# EAGLE board PicoTuner Adaptor (EAGLE 7.7.0)
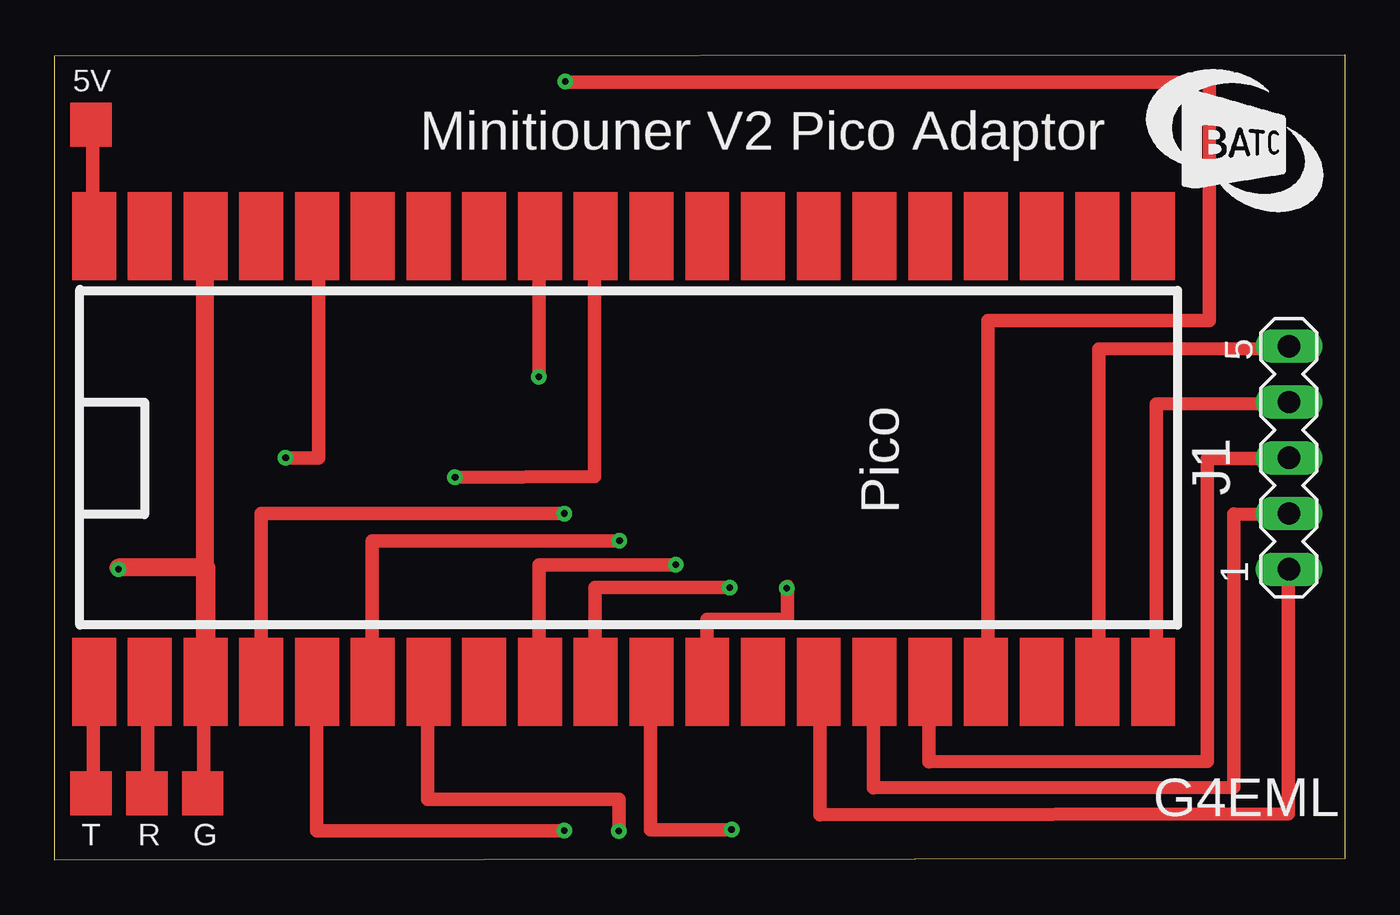
[diagram p0: board, top side]
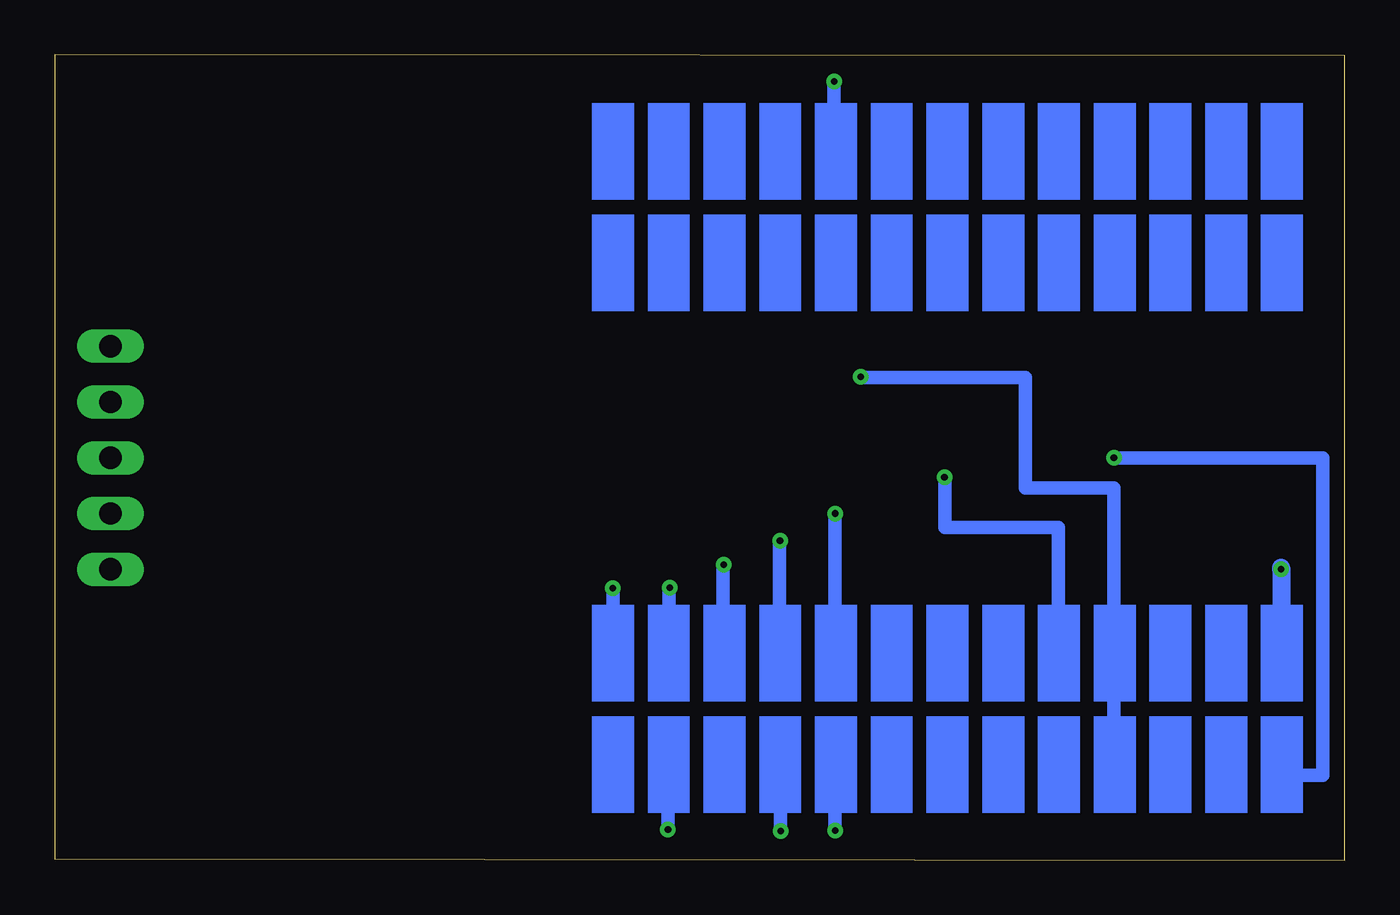
[diagram p1: board, bottom side, seen from below]

Size 58.78 x 36.7 mm. Coordinates in mm from the lower left corner, seen from the top.
Outline: 0,0 0,36.65 58.78,36.7 58.78,0.05 0,0
Copper layers (1*16): Top 0.035mm / dielectric 1.5mm / Bottom 0.035mm
Design rules "default": minimum track width 10mil, minimum drill 24mil, track to track 8mil, track to pad 8mil, pad to pad 8mil, via to via 8mil, smd to smd 8mil, copper to edge 40mil, drill to drill 8mil, minimum pad ring 10mil, minimum via ring 8mil, stop-mask expansion 4mil, vias tented up to drill 0mil, thermal gap 10mil

## Footprints (pad centres in the part's own frame; a part is rotated, then mirrored left to right if it is on the bottom)
MA05-1 = drill 1.016 long: 1 -5.08,0; 2 -2.54,0; 3 0,0; 4 2.54,0; 5 5.08,0

## Placement (x,y rotation side)
E$1  [MA05-1]  56.24,18.34 90 top

## Library data of the parts
E$1 = con-lstb

## Tracks (layer width: path | path; a pad name or v marks a point on that pad's centre or on a via)
S$1  (via drill 0.3)
  Top 0.61: 9.4,8.76 9.4,15.8 v23.22,15.8
  Bottom 0.61: v23.22,15.8 23.22,10.72
S$2  (via drill 0.3)
  Top 0.61: 11.94,6.93 11.94,1.35 v23.22,1.35
  Bottom 0.61: v23.22,1.35 23.22,3.1
S$3  (via drill 0.3)
  Top 0.305: v25.73,14.55 25.76,14.55
  Top 0.61: 14.45,9.02 14.45,14.55 v25.73,14.55
  Bottom 0.61: 25.76,14.55 25.76,10.72
S$4  (via drill 0.3)
  Top 0.305: v25.7,1.32 25.7,1.27
  Top 0.61: 16.99,7.19 16.99,2.77 25.7,2.77 v25.7,1.32
  Bottom 0.305: 25.7,1.27 v25.7,1.32 | 25.7,3.02 25.78,3.02
  Bottom 0.61: v25.7,1.32 25.7,3.02
S$5
  Top 0.61: 34.87,6.71 34.87,2.06 56.21,2.11 56.21,13.26
S$6  (via drill 0.3)
  Top 0.305: v28.3,13.46 28.32,13.46
  Top 0.61: 22.07,9.25 22.07,13.46 v28.3,13.46
  Bottom 0.305: 28.32,10.72 28.3,10.72
  Bottom 0.61: 28.32,13.46 28.32,10.72
S$7  (via drill 0.3)
  Top 0.305: v30.76,12.42 30.78,12.42
  Top 0.61: 24.61,9.37 24.61,12.42 v30.76,12.42
  Bottom 0.305: 30.78,10.72 30.84,10.72
  Bottom 0.61: 30.78,12.42 30.78,10.72
S$8  (via drill 0.3)
  Top 0.61: 27.15,6.76 27.15,1.37 30.84,1.37
  Bottom 0.305: 30.84,1.37 v30.84,1.4 | 30.84,3.12 30.81,3.12
  Bottom 0.61: v30.84,1.4 30.84,3.12
S$9  (via drill 0.3)
  Top 0.305: 33.38,12.47 33.35,12.47
  Top 0.61: 29.72,9.25 29.72,10.97 33.38,10.97 33.38,12.47
  Bottom 0.305: 33.35,12.47 v33.35,12.4 | 33.35,10.69 33.43,10.69
  Bottom 0.61: v33.35,12.4 33.35,10.69
S$10
  Top 0.61: 37.31,6.78 37.31,3.3 53.72,3.33 53.72,15.77 56.16,15.75
S$11
  Top 0.61: 39.83,6.76 39.83,4.47 52.53,4.5 52.53,18.31 56.18,18.31
S$12
  Top 0.61: 42.52,8.74 42.52,24.59 52.6,24.59 52.6,35.46 23.27,35.46
  Bottom 0.305: 23.27,33.58 23.22,33.58
  Bottom 0.61: 23.27,35.46 23.27,33.58
S$13  (via drill 0.3)
  other vias: 23.27,35.48
S$14
  Top 0.61: 50.19,8.74 50.19,20.78 56.24,20.8
S$15
  Top 0.61: 47.57,8.43 47.57,23.29 56.29,23.32
S$16  (via drill 0.3)
  Top 0.61: 12.01,27.58 12.01,18.34 v10.52,18.34
  Bottom 0.61: v10.52,18.34 0.99,18.34 0.99,3.86 2.92,3.86
S$17
  Top 0.305: 22.07,27.53 21.84,27.53
  Top 0.61: 22.07,22.05 22.07,27.53
  Bottom 0.61: 10.52,5.64 10.52,16.97 14.53,16.97
S$18  (via drill 0.3)
  other vias: 22.05,22.02
S$19  (via drill 0.3)
  Top 0.61: 24.59,27.03 24.59,17.48 v18.24,17.45
S$20
  Bottom 0.61: 14.55,16.97 14.55,22 22.05,22
S$21
  Bottom 0.305: 18.21,17.4 18.31,17.4
  Bottom 0.61: 13.06,10.72 13.06,15.16 18.21,15.16 18.21,17.4
S$22  (via drill 0.3)
  Top 0.813: 6.83,27.58 6.83,8.46 6.91,8.46 6.91,13.34 2.9,13.34
  Bottom 0.813: 2.9,13.34 v2.9,13.26 2.9,10.54 3.18,10.54
S$23
  Top 0.61: 1.75,6.78 1.75,3.23
S$24
  Top 0.61: 4.24,6.73 4.24,3.05
S$25
  Top 0.61: 6.78,6.78 6.78,3.18 6.83,3.12
S$26
  Top 0.61: 1.73,29.39 1.73,32.97 1.52,33.17
(copper drawn outside any net)
  shapes: Bottom area x52, Top area x44

## Text on the board
tPlace: 5V | Minitiouner V2 Pico Adaptor | J1 | Pico | G4EML | T | R | G